# Altium PCB B45120517E(origin).PcbDoc (part 2 of 2)
Units mm, origin at the board's own origin, x right, y up, seen from the top; angles counter-clockwise.
Board outline 101.6 x 152.4 mm, 2 copper layers (Top Layer, Bottom Layer); 156 components, 88 nets, 425 pads, 670 vias.
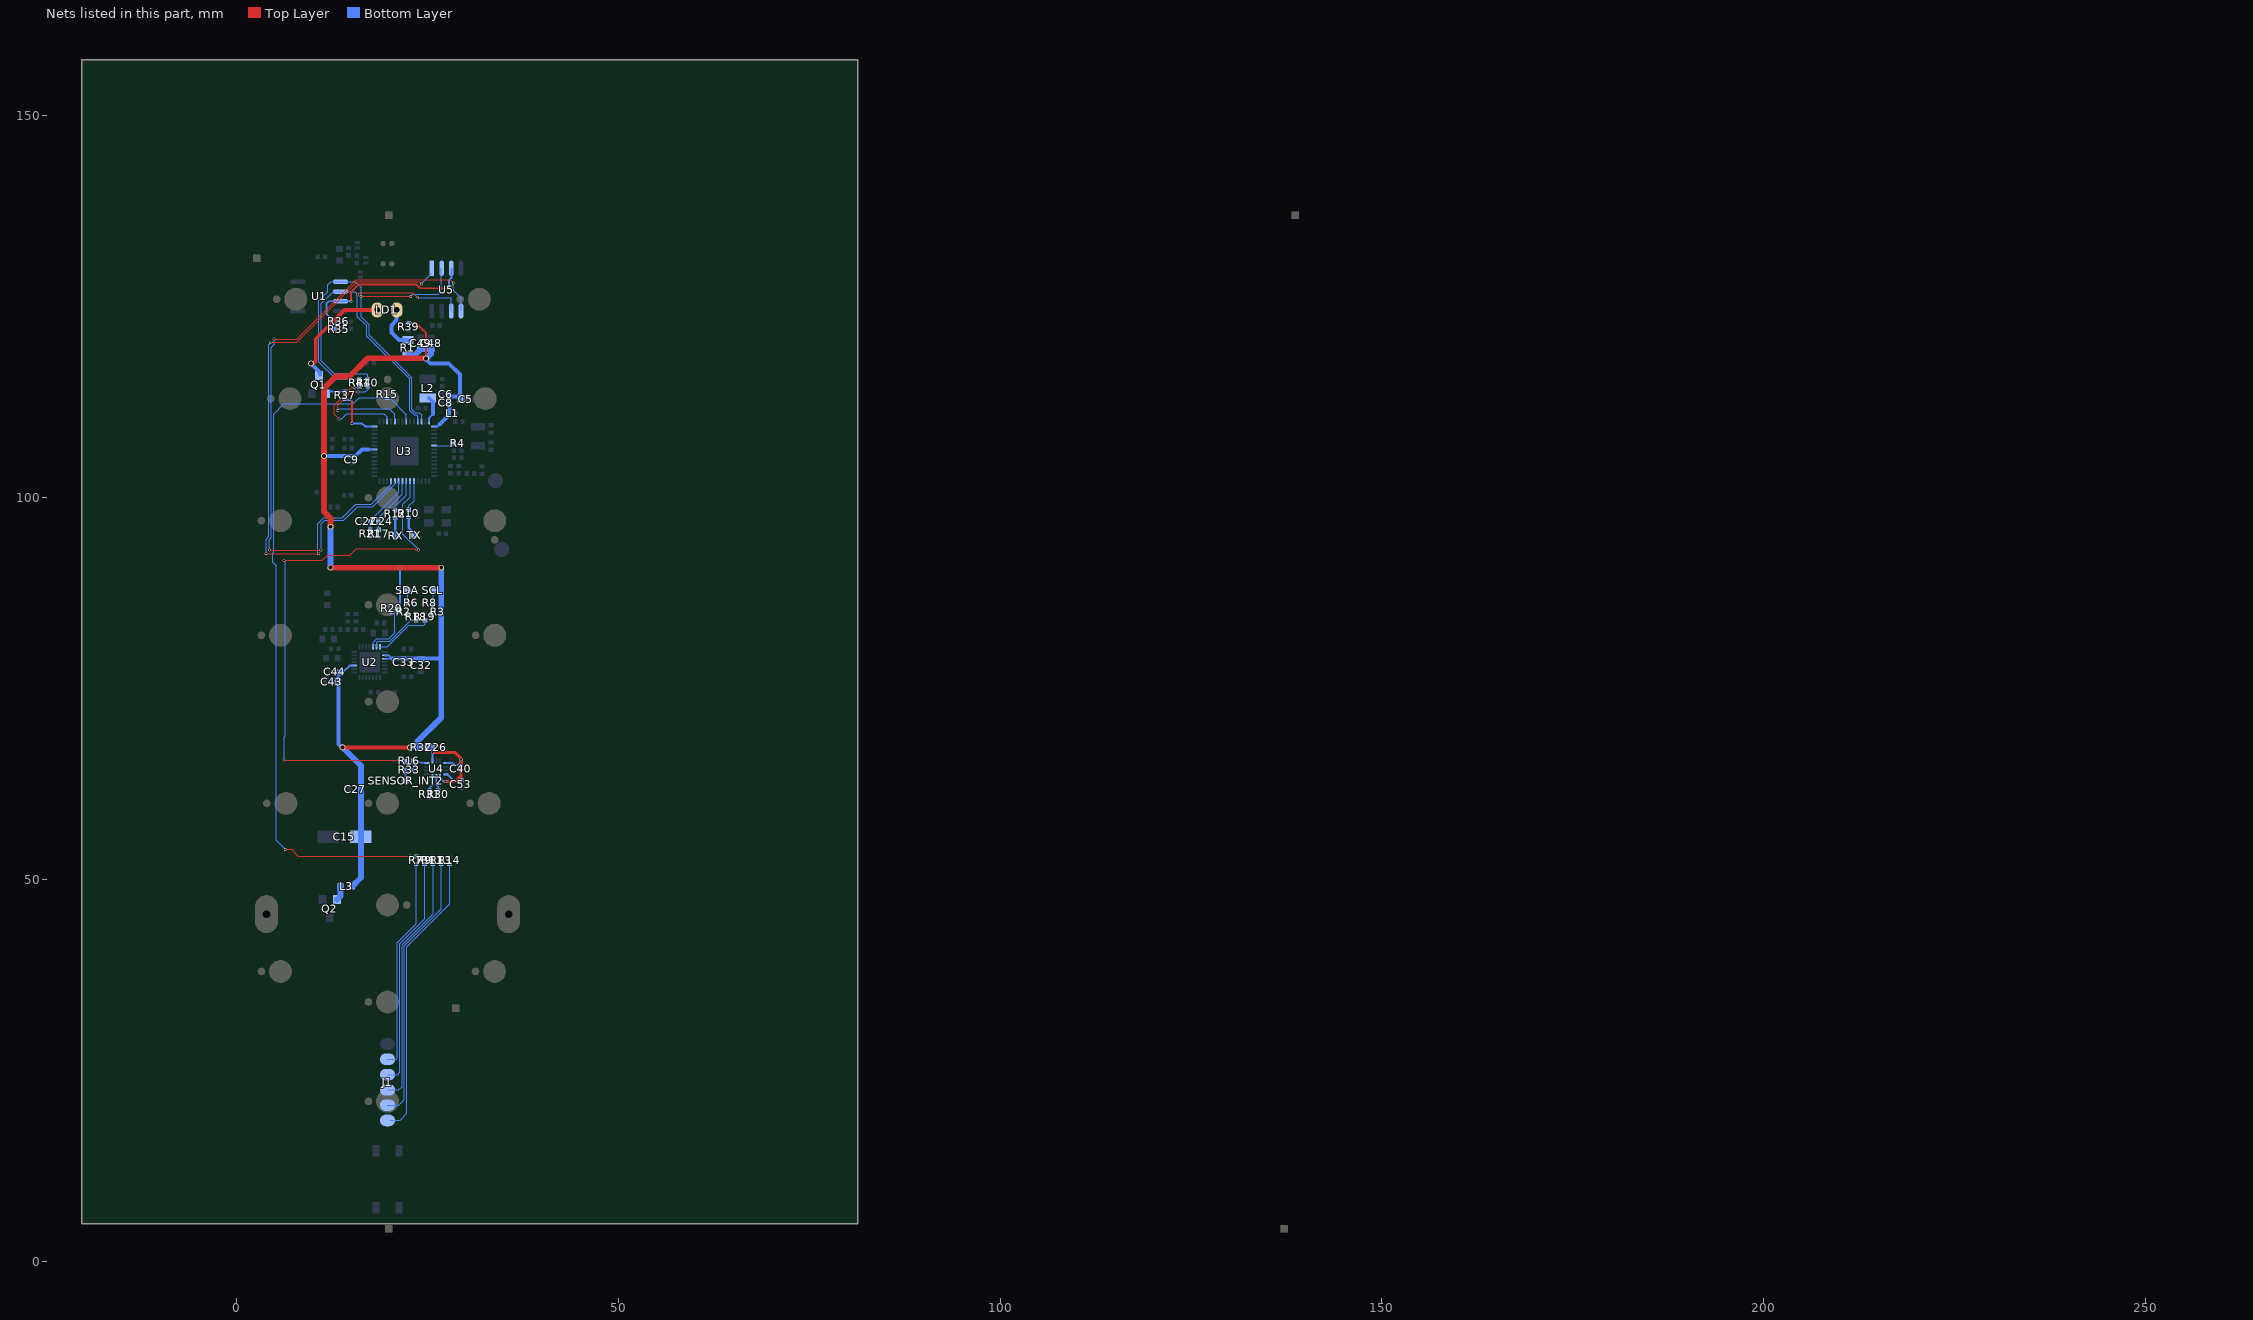
[diagram p2: the nets of this part, all layers, seen from the top]

## Via types
v1: diameter 0.381, hole 0.254, Top Layer to Bottom Layer, tented both sides, 661 vias
v2: diameter 0.762, hole 0.508, Top Layer to Bottom Layer, tented both sides, 9 vias

## Nets (pads, with @x,y where several pads share a name; then routed paths per layer and width w, separated by ;. In a path a pad name is that pad's centre, name@x,y a point inside that pad or via, vN(x,y) a via of type N, cw(c..) or ccw(c..) an arc to the next point about the centre after c; other vN are vias at no path point) (continued)
NetC53_1: C53.1 U4.11 | length 2.3
  Bottom Layer w0.254: U4.11@27.481,63.791 27.623,63.791 28.397,63.017 C53.1@29.439,63.017
NetJ1_2: J1.2 R7.1 | length 27.8
  Bottom Layer w0.152: J1.2@19.817,26.495 20.963,26.495 21.112,26.645 21.112,41.783 23.551,44.221 R7.1@23.551,52.07
NetJ1_3: J1.3 R9.1 | length 30.4
  Bottom Layer w0.152: J1.3@19.817,24.495 21.147,24.495 21.43,24.778 21.43,41.643 24.694,44.907 R9.1@24.694,52.07
NetJ1_4: J1.4 R11.1 | length 32.9
  Bottom Layer w0.152: J1.4@19.817,22.495 21.306,22.495 21.735,22.924 21.735,41.515 25.786,45.566 R11.1@25.786,52.07
NetJ1_5: J1.5 R13.1 | length 35.4
  Bottom Layer w0.152: J1.5@19.817,20.495 21.313,20.495 22.039,21.222 22.039,41.388 26.827,46.176 R13.1@26.827,52.07
NetJ1_6: J1.6 R14.1 | length 37.5
  Bottom Layer w0.152: J1.6@20.147,18.542 21.493,18.542 22.357,19.406 22.357,41.25 27.945,46.838 R14.1@27.945,52.07
NetL2_1: L2.1 U3.56 | length 3.5
  Bottom Layer w0.254: U3.56@25.277,109.996 25.277,110.463 25.76,110.947
  Bottom Layer w0.508: L2.1@25.252,113.081 25.76,112.573 25.76,110.947
NetL3_2: L3.2 Q2.1 | length 1.9
  Bottom Layer w0.762: Q2.1@13.223,47.428 13.651,47.856 L3.2@13.651,49.181
NetLD1_1: LD1.1 R1.1 | length 5.8
  Bottom Layer w0.508: LD1.1@21.02,124.601 21.02,123.255 20.32,122.555 20.32,121.641 21.311,120.65 R1.1@22.479,120.65
NetLD1_2: LD1.2 Q1.3 | length 15.3
  Top Layer w0.508: v2(9.784,117.602) 10.109,117.602 10.419,117.912 10.419,120.828 14.192,124.601 LD1.2@18.48,124.601
  Bottom Layer w0.508: v2(9.784,117.602) 11.003,116.383 Q1.3@11.003,116.129
NetQ1_1: Q1.1 R37.1 | length 2
  Bottom Layer w0.254: Q1.1@12.273,113.894 R37.1@14.305,113.894
NetR4_2: R4.2 U3.6 | length 2.9
  Bottom Layer w0.152: U3.6@25.927,106.846 28.238,106.846 R4.2@28.656,107.264
NetR6_1: R6.1 SDA.1 | length 1.6
  Bottom Layer w0.152: R6.1@22.458,86.233 SDA.1@22.458,87.859
NetR8_1: R8.1 SCL.1 | length 1.5
  Bottom Layer w0.152: R8.1@25.837,86.233 SCL.1@25.837,87.782
NetR10_2: R10.2 TX.1 | length 2.7
  Bottom Layer w0.305: R10.2@22.611,97.485 22.611,96.063 TX.1@23.525,95.148
NetR12_2: R12.2 RX.1 | length 2.3
  Bottom Layer w0.305: RX.1@20.833,95.123 R12.2@20.833,97.409
NetR16_2: R16.2 R33.2 U4.4 | length 3.1
  Bottom Layer w0.203: R33.2@23.144,64.414 R16.2@23.144,65.557 23.881,65.557 24.147,65.291 U4.4@24.955,65.291
NetR18_1: R18.1 U2.27 | length 7
  Bottom Layer w0.152: U2.27@18.38,80.486 18.38,81.042 18.567,81.229 20.102,81.229 22.845,83.972 R18.1@23.576,83.972
NetR19_1: R19.1 U2.28 | length 7.6
  Bottom Layer w0.152: U2.28@18.83,80.486 19.805,80.486 22.606,83.287 24.536,83.287 24.77,83.52 R19.1@24.77,83.922
NetR20_1: R20.1 U2.26 | length 6.9
  Bottom Layer w0.152: U2.26@17.93,80.486 17.93,81.1 18.39,81.559 19.996,81.559 20.752,82.315 20.752,84.709 R20.1@20.371,85.09
NetR30_1: R30.1 U4.13 | length 1.9
  Bottom Layer w0.203: U4.13@26.218,63.528 26.218,62.408 26.446,62.179 R30.1@26.446,61.697
NetR31_1: R31.1 U4.14 | length 2
  Bottom Layer w0.203: R31.1@25.354,61.697 25.354,62.078 25.718,62.441 U4.14@25.718,63.528
NetR33_1: R33.1 SENSOR_INT2.1 | length 1.4
  Bottom Layer w0.305: SENSOR_INT2.1@22.179,62.992 R33.1@22.179,64.414
NetR37_2: R37.2 U3.42 | length 7.1
  Top Layer w0.254: v1(15.143,109.728) v1(15.143,112.827)
  Bottom Layer w0.254: R37.2@14.305,112.928 14.407,112.827 v1(15.143,112.827) ; v1(15.143,109.728) 16.515,109.728 16.897,109.346 U3.42@18.127,109.346
P2_1: R7.2 R15.1 U3.50 | length 95.2
  Top Layer w0.152: v1(6.431,53.975) 7.269,53.975 8.158,53.086 v1(22.763,53.086)
  Bottom Layer w0.152: v1(6.431,53.975) 5.25,55.156 5.25,91.097 4.805,91.542 4.805,92.786 4.907,92.888 4.907,110.947 6.253,112.293 15.316,112.293 16.104,113.081 20.095,113.081 22.277,110.899 U3.50@22.277,109.996 ; v1(22.763,53.086) R7.2@23.525,53.086
PIO3: U3.24 U5.5 | length 81.3
  Top Layer w0.152: v1@4.348,93.142 v1(11.13,93.142) ; v1(4.971,120.777) 7.931,120.777 15.715,128.561 28.005,128.561 v1(28.423,128.143)
  Bottom Layer w0.152: v1(4.348,93.167) 4.348,94.564 4.589,94.805 4.589,119.697 4.971,120.078 v1(4.971,120.777) ; v1(11.13,93.142) 11.13,96.576 11.594,97.039 14.089,97.039 15.907,98.857 17.861,98.857 20.777,101.772 U3.24@20.777,102.196 ; v1(28.423,128.143) 28.423,127.178 29.464,126.136 U5.5@29.464,124.454
PIO4: U3.25 U5.1 | length 75.9
  Top Layer w0.152: v1(3.929,92.685) v1(10.774,92.685) ; v1@4.551,120.345 7.931,120.345 15.842,128.256 23.996,128.256 v1(24.236,128.016)
  Bottom Layer w0.152: v1(3.929,92.685) 3.929,94.601 4.272,94.944 4.272,120.066 v1@4.551,120.345 ; v1(10.774,92.685) 10.711,92.748 10.711,96.608 11.473,97.37 13.886,97.37 15.678,99.162 17.683,99.162 20.277,101.755 U3.25@20.277,102.196 ; v1(24.236,128.016) U5.1@25.644,129.423
  other v1: 4.551,120.371
RX: R12.1 U3.21 | length 4.4
  Bottom Layer w0.152: R12.1@20.833,98.374 20.833,98.887 22.277,100.331 U3.21@22.277,102.196
SCL: R40.2 U1.6 U3.53 U5.6 | length 54.8
  Top Layer w0.152: v1(15.88,126.619) 15.905,126.619 16.108,126.822 23.144,126.822 v1(23.779,126.187)
  Bottom Layer w0.152: R40.2@17.247,115.57 17.247,116.103 17.094,116.256 12.878,116.256 11.176,117.958 11.176,125.476 12.7,127 15.499,127 v1(15.88,126.619) 15.88,123.722 17.089,122.513 17.089,121.172 22.7,115.561 22.7,111.492 23.335,110.857 23.613,110.857 23.777,110.693 U3.53@23.777,109.996 ; v1(23.779,126.187) 28.07,126.187 28.194,126.064 U5.6@28.194,124.454
SCL1: C24.2 R17.2 U3.22 | length 7.6
  Bottom Layer w0.152: R17.2@18.694,95.86 18.694,97.384 21.777,100.466 U3.22@21.777,102.196
SCL-1: R40.1 U3.47 | length 14.7
  Top Layer w0.152: v1(13.31,111.43) 13.31,112.141 15.037,113.868 v1(15.977,113.868)
  Bottom Layer w0.152: v1(13.31,111.43) 13.524,111.644 20.055,111.644 20.777,110.922 U3.47@20.777,109.996 ; v1(15.977,113.868) 16.916,113.868 17.272,114.224 R40.1@17.272,114.63
SDA: R41.2 U1.5 U3.54 U5.2 | length 56.6
  Top Layer w0.152: v1(16.362,126.39) v1@22.86,126.39
  Bottom Layer w0.152: R41.2@16.154,115.57 13.03,115.57 10.846,117.754 10.846,125.832 12.014,127 12.014,127.889 12.395,128.27 15.626,128.27 16.362,127.533 16.362,123.673 17.406,122.629 17.406,121.303 23.005,115.705 23.005,111.619 23.454,111.169 23.963,111.169 24.277,110.856 U3.54@24.277,109.996 ; v1(22.86,126.34) 23.139,126.619 26.467,126.619 26.873,127.025 U5.2@26.873,130.054
SDA1: C22.2 R21.2 U3.23 | length 7.9
  Bottom Layer w0.152: R21.2@17.551,95.86 17.551,97.003 21.277,100.728 U3.23@21.277,102.196
SDA-1: R41.1 U3.45 | length 13.5
  Top Layer w0.152: v1(13.462,110.338) 12.852,110.947 12.852,112.135 15.17,114.452 v1(15.469,114.452)
  Bottom Layer w0.152: v1@13.513,110.363 13.818,110.363 14.489,111.035 19.318,111.035 19.777,110.576 U3.45@19.777,109.996 ; v1(15.469,114.452) R41.1@16.078,114.452
SENSOR_INT: R16.1 U3.20 | length 70.7
  Top Layer w0.152: v1(6.248,91.821) 11.307,91.821 11.993,92.507 14.884,92.507 15.697,93.32 23.393,93.32 23.546,93.167 v1(23.876,93.167) ; v1(6.279,65.659) v1(21.265,65.659)
  Bottom Layer w0.152: v1(6.248,91.821) 6.444,91.626 6.444,68.821 6.279,68.656 v1(6.279,65.659) ; v1(21.265,65.659) R16.1@22.077,65.659 ; U3.20@22.777,102.196 22.777,100.094 21.844,99.162 21.844,95.225 v1@23.889,93.18
TX: R10.1 U3.19 | length 4.1
  Bottom Layer w0.152: R10.1@22.611,98.45 22.611,98.958 23.292,99.639 U3.19@23.292,102.26
VBAT: C5.1 C6.1 C8.1 C9.1 C15.1 C27.1 C32.1 C33.1 C43.1 C44.1 C48.1 C49.1 L1.1 L3.1 R1.2 R2.1 R3.1 R32.2 R39.2 U2.2 U2.3 U2.17 U3.1 U3.36 | length 167
  Top Layer w0.254: v1(23.552,122.885) 24.846,121.591 v2(24.846,118.262)
  Top Layer w0.508: v2(13.924,67.335) v2(22.738,67.335)
  Top Layer w0.762: v2(12.375,90.856) v2(26.853,90.856) ; v2(12.375,96.215) 12.375,97.307 11.498,98.184 11.498,114.338 13.035,115.875 14.838,115.875 17.226,118.262 v2(24.846,118.262)
  Bottom Layer w0.254: C44.1@13.391,77.216 14.026,77.216 14.846,78.036 U2.17@15.48,78.036 ; 17.327,106.346 U3.36@18.127,106.346 ; U2.3@19.48,78.936 20.368,78.936 ; U2.2@19.48,79.386 19.984,79.386 20.401,78.969 ; R2.1@21.442,85.09 v1(21.442,90.83) ; R39.2@22.581,122.885 v1(23.552,122.885) ; U3.1@25.927,109.346 26.369,109.346 26.611,109.588
  Bottom Layer w0.508: v2(11.498,105.461) 15.6,105.461 16.485,106.346 17.327,106.346 ; C44.1@13.391,77.216 13.391,67.767 v2@13.822,67.335 ; 20.401,78.969 26.853,78.969 ; v2(22.738,67.335) R32.2@23.728,67.335 ; v2@24.846,118.166 25.41,117.602 27.842,117.602 29.291,116.153 C5.1@29.291,112.903 28.935,113.259 27.945,113.259 27.945,111.608 27.818,111.481 27.818,110.795 26.611,109.588
  Bottom Layer w0.762: v2(12.375,90.856) v2(12.375,96.215) ; v2(13.924,67.335) 16.337,64.922 16.337,50.292 L3.1@15.194,49.149 ; R1.2@22.479,118.618 23.317,118.618 C49.1@24.155,119.456 C48.1@25.552,119.456 ; R32.2@23.728,67.335 23.728,68.097 26.853,71.222 v2(26.853,90.856) ; v2@24.846,118.166 25.527,118.847 C48.1@25.527,119.075
VDD_SENSOR: C26.1 C40.1 R32.1 U4.5 U4.8 U4.12 | length 15.3
  Top Layer w0.406: v1(25.718,66.675) 28.631,66.675 29.418,65.888 29.418,63.551 28.707,62.84 v1(27.386,62.84)
  Bottom Layer w0.25: U4.5@25.718,65.554 C26.1@25.718,67.318 ; U4.12@26.718,63.528 26.718,63.279 27.157,62.84 v1(27.386,62.84) ; U4.8@27.481,65.291 28.389,65.291 28.656,65.024 C40.1@29.393,65.024
  Bottom Layer w0.406: R32.1@24.694,67.335 C26.1@25.735,67.335 ; C40.1@29.393,65.024 29.418,65.049 v1(29.418,65.735)
WP: R35.2 R36.2 U1.7 U5.3 | length 25
  Top Layer w0.254: v1(15.016,125.73) 15.016,126.928 15.989,127.9 23.665,127.9 24.133,127.432 v1(27.864,127.432)
  Bottom Layer w0.254: R35.2@12.984,121.869 R36.2@12.984,123.139 ; R36.2@13.086,123.088 12.802,123.088 11.816,124.074 11.816,125.4 12.146,125.73 v1(15.016,125.73) ; v1(27.864,127.432) 27.864,128.499 28.169,128.804 U5.3@28.169,130.054
pads on no net: MARK1.1 MARK1.4 MARK2.1 MARK2.4 MARK3.1 MARK3.4 MARK4.1 MARK4.4 MARK5.1 MARK5.4 MARK6.1 MARK6.4 MARK7.1 MARK7.4 MARK8.1 MARK8.4 MARK9.1 MARK10.1 MARK10.4 MARK11.1 MARK12.1 MARK12.4 U2.9 U2.10 U2.11 U2.12 U2.14 U2.15 U2.16 U2.23 U2.24 U3.0@17.403,103.352 U3.0@17.403,105.842 U3.0@17.403,108.356 U3.0@19.766,110.668 U3.0@20.274,101.473 U3.0@22.28,110.668 U3.0@22.763,101.473 U3.0@24.769,110.668 U3.0@25.277,101.473 U3.0@26.649,104.851 U3.0@26.649,107.34 U3.2 U3.16 U3.17 U3.18 U3.32 U3.33 U3.51 U4.2 U4.3 U4.9 U4.10

## Polygon pours and split planes (outlines as drawn)
AGND on Top Layer "Top Layer-AGND" (solid, remove dead copper, pour order 1000): 10.698,86.538 10.698,72.898 26.167,72.898 26.167,86.538
GND on Top Layer "Top Layer-GND" (solid, remove dead copper, pour order 1001): -0.786,137.173 40.616,137.173 40.616,86.525 10.669,86.525 10.669,72.885 26.138,72.885 26.138,86.525 40.616,86.525 40.616,31.077 24.385,31.077 24.385,5.143 14.784,5.143 14.784,30.772 -0.786,30.772
GND on Bottom Layer "Bottom Layer-GND" (solid, remove dead copper, pour order 1003): -0.785,137.154 40.617,137.154 40.617,86.506 10.67,86.506 10.67,72.866 26.139,72.866 26.139,86.506 40.617,86.506 40.617,31.058 24.386,31.058 24.386,5.124 14.785,5.124 14.785,30.753 -0.785,30.753
AGND on Bottom Layer "Bottom Layer-AGND" (solid, remove dead copper, pour order 1002): 10.693,86.538 10.693,72.898 26.162,72.898 26.162,86.538

## Keep-outs
Top Overlay:
  circle w0.127: c34.767,93.251 r0.8
  circle w0.127: c34.159,97.32 r0.5
  circle w0.127: c33.969,102.25 r0.8
  circle w0.127: c34.159,107.12 r0.5
Keep-Out Layer:
  circle w0.127: c13.679,118.909 r1.6
  circle w0.127: c26.659,40.76 r1.6
  circle w0.127: c5,3 r1.5
  circle w0.127: c153.632,2.995 r1.5
  circle w0.127: c153.632,138.3 r1.5
  circle w0.127: c5,138.3 r1.5
  circle w0.127: c26.659,40.76 r1.6
  circle w0.127: c13.679,118.909 r1.6
  circle w0.127: c53.337,118.909 r1.6
  circle w0.127: c66.317,40.76 r1.6
  circle w0.127: c66.317,40.761 r1.6
  circle w0.127: c53.337,118.909 r1.6
  circle w0.127: c92.995,118.909 r1.6
  circle w0.127: c105.975,40.76 r1.6
  circle w0.127: c105.975,40.76 r1.6
  circle w0.127: c92.995,118.909 r1.6
  circle w0.127: c132.653,118.909 r1.6
  circle w0.127: c145.633,40.76 r1.6
  circle w0.127: c145.633,40.761 r1.6
  circle w0.127: c132.653,118.909 r1.6
  lines w0.127: 12.6,135.3 12.6,132.6 1.4,132.6 1.4,120.94 0,120.94 0,109.5 ; 15.8,6 23.7,6 ; 55.458,6 63.358,6 ; 79.316,120.94 77.916,120.94 77.916,132.6 66.715,132.6 66.715,135.3 52.258,135.3 52.258,132.6 41.058,132.6 41.058,120.94 39.658,120.94 ; 95.116,6 103.016,6 ; 95.145,31.5 95.145,6.01 103.145,6.01 103.145,31.5 118.974,31.5 ; 95.145,31.5 79.316,31.5 ; 117.573,43.5 118.974,43.5 ; 117.573,76 118.974,76 ; 117.573,101.5 118.974,101.5 ; 117.573,109.5 118.974,109.5 ; 117.573,43.5 117.573,76 ; 117.573,101.5 117.573,109.5 ; 118.974,120.94 117.573,120.94 117.573,132.6 106.373,132.6 106.373,135.3 91.916,135.3 91.916,132.6 80.716,132.6 80.716,120.94 79.316,120.94 79.316,109.5 ; 134.774,6 142.674,6 ; 142.803,31.5 142.803,6.01 134.803,6.01 134.803,31.5 118.974,31.5 ; 142.803,31.5 158.632,31.5 158.632,43.5 157.231,43.5 ; 157.231,76 158.632,76 158.632,101.5 157.231,101.5 ; 157.231,109.5 158.632,109.5 158.632,120.94 157.232,120.94 157.232,132.6 146.031,132.6 146.031,135.3 131.574,135.3 131.574,132.6 120.374,132.6 120.374,120.94 118.974,120.94 118.974,109.5 ; 157.231,43.5 157.231,76 ; 157.231,101.5 157.231,109.5 ; 157.632,-0.006 ccw(c157.632,0.994) 158.632,0.994 158.632,5.995 ; 157.632,0 22.986,0 1,0 cw(c1,1) 0,1 0,6 158.632,6 ; 0,31.5 15.829,31.5 ; 0,31.5 0,43.5 ; 0,31.5 0,43.5 ; 0,31.5 15.829,31.5 ; 0,31.5 0,43.5 ; 0,31.5 15.829,31.5 ; 0,43.5 1.4,43.5 ; 0,43.5 1.4,43.5 ; 0,43.5 1.4,43.5 ; 0,76 1.4,76 ; 0,76 0,101.5 ; 0,76 1.4,76 ; 0,76 0,101.5 ; 0,76 1.4,76 ; 0,76 0,101.5 ; 0,101.5 1.4,101.5 ; 0,101.5 1.4,101.5 ; 0,101.5 1.4,101.5 ; 0,109.5 1.4,109.5 ; 0,109.5 1.4,109.5 ; 0,109.5 1.4,109.5 ; 1.4,43.5 1.4,76 ; 1.4,43.5 1.4,76 ; 1.4,43.5 1.4,76 ; 1.4,101.5 1.4,109.5 ; 1.4,101.5 1.4,109.5 ; 1.4,101.5 1.4,109.5 ; 15.829,6.01 15.829,31.5 ; 15.829,6.01 23.82,6.01 23.82,31.5 39.658,31.5 ; 15.829,6.01 15.829,31.5 ; 15.829,6.01 23.829,6.01 ; 15.829,6.01 15.829,31.5 ; 15.829,6.01 23.829,6.01 ; 23.829,6.01 23.829,31.5 39.658,31.5 ; 23.829,6.01 23.811,31.5 39.658,31.5 ; 27.057,135.3 0,135.3 0,140.3 cw(c1,140.3) 1,141.3 25.577,141.3 157.632,141.3 cw(c157.632,140.3) 158.632,140.3 158.632,135.3 27.057,135.3 ; 27.057,135.3 27.057,132.6 38.257,132.6 38.257,120.94 39.658,120.94 ; 38.257,43.5 38.257,76 ; 38.257,43.5 39.658,43.5 ; 38.257,43.5 38.257,76 ; 38.257,43.5 39.658,43.5 ; 38.257,43.5 38.257,76 ; 38.257,43.5 39.658,43.5 ; 38.257,76 39.658,76 ; 38.257,76 39.658,76 ; 38.257,76 39.658,76 ; 38.257,101.5 39.658,101.5 ; 38.257,101.5 38.257,109.5 ; 38.257,101.5 39.658,101.5 ; 38.257,101.5 38.257,109.5 ; 38.257,101.5 38.257,109.5 ; 38.257,101.5 39.658,101.5 ; 38.257,109.5 39.658,109.5 ; 38.257,109.5 39.658,109.5 ; 38.257,109.5 39.658,109.5 ; 39.658,31.5 39.658,43.5 ; 39.658,31.5 39.658,43.5 ; 39.658,31.5 55.487,31.5 55.487,6.01 63.487,6.01 63.487,31.5 79.316,31.5 ; 39.658,31.5 39.658,43.5 ; 39.658,31.5 39.658,43.5 ; 39.658,43.5 41.058,43.5 41.058,76 39.658,76 ; 39.658,76 39.658,101.5 ; 39.658,76 39.658,101.5 ; 39.658,76 39.658,101.5 ; 39.658,76 39.658,101.5 ; 39.658,101.5 41.058,101.5 41.058,109.5 39.658,109.5 ; 39.658,109.5 39.658,120.94 ; 79.316,31.5 79.316,43.5 ; 79.316,31.5 79.316,43.5 ; 79.316,43.5 77.915,43.5 77.915,76 79.316,76 ; 79.316,43.5 80.716,43.5 80.716,76 79.316,76 ; 79.316,76 79.316,101.5 ; 79.316,76 79.316,101.5 ; 79.316,101.5 77.915,101.5 77.915,109.5 79.316,109.5 ; 79.316,101.5 80.716,101.5 80.716,109.5 79.316,109.5 ; 118.974,31.5 118.974,43.5 ; 118.974,31.5 118.974,43.5 ; 118.974,43.5 120.374,43.5 120.374,76 118.974,76 ; 118.974,76 118.974,101.5 ; 118.974,76 118.974,101.5 ; 118.974,101.5 120.374,101.5 120.374,109.5 118.974,109.5

## Other copper
Top Layer:
  pour cut-out: 17.551,125.755 17.551,123.469 17.78,123.368 21.92,123.368 22.123,123.368 22.149,125.755
  pour cut-out: 27.997,127.111 28.47,126.982 28.829,127.356 28.29,127.822
  pour cut-out: 31.047,137.262 31.047,109.836 35.001,110.465 35.01,98.959 33.104,98.959 33.104,93.579 34.002,93.511 34.036,84.988 39.268,84.989 39.878,84.988 39.649,137.262
  pour cut-out: 19.826,24.522 20.131,24.522 20.639,24.42 21.121,24.268 21.629,24.014 22.061,23.709 22.391,23.404 22.671,23.074 22.95,22.642 23.153,22.185 23.17,21.666 23.17,21.387 23.17,20.98 23.17,20.726 23.17,20.472 23.17,20.091 23.153,19.772 22.95,19.34 22.747,18.985 22.468,18.654 22.137,18.324 21.883,18.121 21.629,17.943 21.375,17.842 20.944,17.689 20.563,17.562 19.978,17.511 19.293,17.537 18.785,17.638 18.277,17.842 17.845,18.121 17.413,18.451 17.007,18.908 16.702,19.391 16.54,19.914 16.54,20.396 16.54,20.93 16.54,21.59 16.54,21.895 16.549,22.287 16.905,22.947 17.388,23.557 17.972,23.988 18.454,24.242 19.064,24.446
  pour cut-out: 33.835,41.522 34.14,41.522 34.648,41.42 35.13,41.268 35.638,41.014 36.07,40.709 36.4,40.404 36.68,40.074 36.959,39.642 37.162,39.185 37.264,38.753 37.34,38.271 37.341,38 37.34,37.585 37.264,37.102 37.162,36.772 36.959,36.34 36.756,35.985 36.477,35.654 36.146,35.324 35.892,35.121 35.638,34.943 35.384,34.842 34.953,34.689 34.572,34.562 33.987,34.511 33.302,34.537 32.794,34.638 32.286,34.842 31.854,35.121 31.422,35.451 31.016,35.908 30.711,36.391 30.482,36.924 30.355,37.483 30.304,38.017 30.381,38.677 30.558,39.287 30.914,39.947 31.397,40.557 31.981,40.988 32.463,41.242 33.073,41.446
  pour cut-out: 19.823,37.522 20.128,37.522 20.636,37.42 21.118,37.268 21.626,37.014 22.058,36.709 22.388,36.404 22.668,36.074 22.947,35.642 23.15,35.185 23.252,34.753 23.328,34.271 23.329,34 23.328,33.585 23.252,33.102 23.15,32.772 22.947,32.34 22.744,31.985 22.465,31.654 22.134,31.324 21.88,31.121 21.626,30.943 21.372,30.842 20.941,30.689 20.56,30.562 19.975,30.511 19.29,30.537 18.782,30.638 18.274,30.842 17.842,31.121 17.41,31.451 17.004,31.908 16.699,32.391 16.47,32.924 16.343,33.483 16.292,34.017 16.369,34.677 16.546,35.287 16.902,35.947 17.385,36.557 17.969,36.988 18.451,37.242 19.061,37.446
  pour cut-out: 5.811,41.522 6.116,41.522 6.624,41.42 7.106,41.268 7.614,41.014 8.046,40.709 8.376,40.404 8.656,40.074 8.935,39.642 9.138,39.185 9.24,38.753 9.316,38.271 9.317,38 9.316,37.585 9.24,37.102 9.138,36.772 8.935,36.34 8.732,35.985 8.453,35.654 8.122,35.324 7.868,35.121 7.614,34.943 7.36,34.842 6.929,34.689 6.548,34.562 5.963,34.511 5.278,34.537 4.77,34.638 4.262,34.842 3.83,35.121 3.398,35.451 2.992,35.908 2.687,36.391 2.458,36.924 2.331,37.483 2.28,38.017 2.357,38.677 2.534,39.287 2.89,39.947 3.373,40.557 3.957,40.988 4.439,41.242 5.049,41.446
  pour cut-out: 19.823,50.222 20.128,50.222 20.636,50.12 21.118,49.968 21.626,49.714 22.058,49.409 22.388,49.104 22.668,48.774 22.947,48.342 23.15,47.885 23.252,47.453 23.328,46.971 23.329,46.7 23.328,46.285 23.252,45.802 23.15,45.472 22.947,45.04 22.744,44.685 22.465,44.354 22.134,44.024 21.88,43.821 21.626,43.643 21.372,43.542 20.941,43.389 20.56,43.262 19.975,43.211 19.29,43.237 18.782,43.338 18.274,43.542 17.842,43.821 17.41,44.151 17.004,44.608 16.699,45.091 16.47,45.624 16.343,46.183 16.292,46.717 16.369,47.377 16.546,47.987 16.902,48.647 17.385,49.257 17.969,49.688 18.451,49.942 19.061,50.146
  pour cut-out: 33.123,63.522 33.428,63.522 33.936,63.42 34.418,63.268 34.926,63.014 35.358,62.709 35.688,62.404 35.968,62.074 36.247,61.642 36.45,61.185 36.552,60.753 36.628,60.271 36.629,60 36.628,59.585 36.552,59.102 36.45,58.772 36.247,58.34 36.044,57.985 35.765,57.654 35.434,57.324 35.18,57.121 34.926,56.943 34.672,56.842 34.241,56.689 33.86,56.562 33.275,56.511 32.59,56.537 32.082,56.638 31.574,56.842 31.142,57.121 30.71,57.451 30.304,57.908 29.999,58.391 29.77,58.924 29.643,59.483 29.592,60.017 29.669,60.677 29.846,61.287 30.202,61.947 30.685,62.557 31.269,62.988 31.751,63.242 32.361,63.446
  pour cut-out: 19.823,63.522 20.128,63.522 20.636,63.42 21.118,63.268 21.626,63.014 22.058,62.709 22.388,62.404 22.668,62.074 22.947,61.642 23.15,61.185 23.252,60.753 23.328,60.271 23.329,60 23.328,59.585 23.252,59.102 23.15,58.772 22.947,58.34 22.744,57.985 22.465,57.654 22.134,57.324 21.88,57.121 21.626,56.943 21.372,56.842 20.941,56.689 20.56,56.562 19.975,56.511 19.29,56.537 18.782,56.638 18.274,56.842 17.842,57.121 17.41,57.451 17.004,57.908 16.699,58.391 16.47,58.924 16.343,59.483 16.292,60.017 16.369,60.677 16.546,61.287 16.902,61.947 17.385,62.557 17.969,62.988 18.451,63.242 19.061,63.446
  pour cut-out: 6.523,63.522 6.828,63.522 7.336,63.42 7.818,63.268 8.326,63.014 8.758,62.709 9.088,62.404 9.368,62.074 9.647,61.642 9.85,61.185 9.952,60.753 10.028,60.271 10.029,60 10.028,59.585 9.952,59.102 9.85,58.772 9.647,58.34 9.444,57.985 9.165,57.654 8.834,57.324 8.58,57.121 8.326,56.943 8.072,56.842 7.641,56.689 7.26,56.562 6.675,56.511 5.99,56.537 5.482,56.638 4.974,56.842 4.542,57.121 4.11,57.451 3.704,57.908 3.399,58.391 3.17,58.924 3.043,59.483 2.992,60.017 3.069,60.677 3.246,61.287 3.602,61.947 4.085,62.557 4.669,62.988 5.151,63.242 5.761,63.446
  pour cut-out: 19.823,76.822 20.128,76.822 20.636,76.72 21.118,76.568 21.626,76.314 22.058,76.009 22.388,75.704 22.668,75.374 22.947,74.942 23.15,74.485 23.252,74.053 23.328,73.571 23.329,73.3 23.328,72.885 23.252,72.402 23.15,72.072 22.947,71.64 22.744,71.285 22.465,70.954 22.134,70.624 21.88,70.421 21.626,70.243 21.372,70.142 20.941,69.989 20.56,69.862 19.975,69.811 19.29,69.837 18.782,69.938 18.274,70.142 17.842,70.421 17.41,70.751 17.004,71.208 16.699,71.691 16.47,72.224 16.343,72.783 16.292,73.317 16.369,73.977 16.546,74.587 16.902,75.247 17.385,75.857 17.969,76.288 18.451,76.542 19.061,76.746
  pour cut-out: 33.85,85.522 34.155,85.522 34.663,85.42 35.145,85.268 35.653,85.014 36.085,84.709 36.415,84.404 36.695,84.074 36.974,83.642 37.177,83.185 37.279,82.753 37.355,82.271 37.356,82 37.355,81.585 37.279,81.102 37.177,80.772 36.974,80.34 36.771,79.985 36.492,79.654 36.161,79.324 35.907,79.121 35.653,78.943 35.399,78.842 34.968,78.689 34.587,78.562 34.002,78.511 33.317,78.537 32.809,78.638 32.301,78.842 31.869,79.121 31.437,79.451 31.031,79.908 30.726,80.391 30.497,80.924 30.37,81.483 30.319,82.017 30.396,82.677 30.573,83.287 30.929,83.947 31.412,84.557 31.996,84.988 32.478,85.242 33.088,85.446
  pour cut-out: 18.153,88.737 18.509,88.915 18.89,89.067 19.22,89.143 19.55,89.194 19.956,89.194 20.363,89.169 20.795,89.042 21.125,88.94 21.557,88.711 21.861,88.508 22.141,88.254 22.395,87.975 22.598,87.67 22.725,87.416 22.852,87.111 22.954,86.781 23.004,86.476 23.029,86 23.03,85.613 22.954,85.206 22.801,84.749 22.623,84.393 22.446,84.114 22.192,83.809 21.861,83.53 21.582,83.327 21.201,83.098 20.896,82.971 20.515,82.869 20.16,82.819 19.779,82.793 19.321,82.844 18.864,82.946 18.458,83.123 18.153,83.276 17.924,83.454 17.594,83.708 17.493,83.835 17.239,84.139 17.035,84.419 16.908,84.698 16.781,85.003 16.705,85.308 16.654,85.613 16.629,85.917 16.654,86.248 16.705,86.603 16.807,86.959 16.934,87.314 17.086,87.645 17.239,87.899 17.467,88.178 17.747,88.457
  pour cut-out: 33.85,100.522 34.155,100.522 34.663,100.42 35.145,100.268 35.653,100.014 36.085,99.709 36.415,99.404 36.695,99.074 36.974,98.642 37.177,98.185 37.279,97.753 37.355,97.271 37.356,97 37.355,96.585 37.279,96.102 37.177,95.772 36.974,95.34 36.771,94.985 36.492,94.654 36.161,94.324 35.907,94.121 35.653,93.943 35.399,93.842 34.968,93.689 34.587,93.562 34.002,93.511 33.317,93.537 32.809,93.638 32.301,93.842 31.869,94.121 31.437,94.451 31.031,94.908 30.726,95.391 30.497,95.924 30.37,96.483 30.319,97.017 30.396,97.677 30.573,98.287 30.929,98.947 31.412,99.557 31.996,99.988 32.478,100.242 33.088,100.446
  pour cut-out: 5.796,100.522 6.101,100.522 6.609,100.42 7.091,100.268 7.599,100.014 8.031,99.709 8.361,99.404 8.641,99.074 8.92,98.642 9.123,98.185 9.225,97.753 9.301,97.271 9.302,97 9.301,96.585 9.225,96.102 9.123,95.772 8.92,95.34 8.717,94.985 8.438,94.654 8.107,94.324 7.853,94.121 7.599,93.943 7.345,93.842 6.914,93.689 6.533,93.562 5.948,93.511 5.263,93.537 4.755,93.638 4.247,93.842 3.815,94.121 3.383,94.451 2.977,94.908 2.672,95.391 2.443,95.924 2.316,96.483 2.265,97.017 2.342,97.677 2.519,98.287 2.875,98.947 3.358,99.557 3.942,99.988 4.424,100.242 5.034,100.446
  pour cut-out: 32.608,116.509 32.913,116.509 33.421,116.407 33.903,116.255 34.411,116.001 34.843,115.696 35.173,115.391 35.453,115.061 35.732,114.629 35.935,114.172 36.037,113.74 36.113,113.258 36.114,112.987 36.113,112.572 36.037,112.089 35.935,111.759 35.732,111.327 35.529,110.972 35.25,110.641 34.919,110.311 34.665,110.108 34.411,109.93 34.157,109.829 33.726,109.676 33.345,109.549 32.76,109.498 32.075,109.524 31.567,109.625 31.059,109.829 30.627,110.108 30.195,110.438 29.789,110.895 29.484,111.378 29.418,111.912 29.24,112.471 29.077,113.004 29.154,113.664 29.331,114.274 29.687,114.934 30.17,115.544 30.754,115.975 31.236,116.229 31.846,116.433
  pour cut-out: 7.037,116.509 7.342,116.509 7.85,116.407 8.332,116.255 8.84,116.001 9.272,115.696 9.602,115.391 9.882,115.061 10.161,114.629 10.364,114.172 10.466,113.74 10.542,113.258 10.543,112.987 10.542,112.572 10.466,112.089 10.364,111.759 10.161,111.327 9.958,110.972 9.679,110.641 9.348,110.311 9.094,110.108 8.84,109.93 8.586,109.829 8.155,109.676 7.774,109.549 7.189,109.498 6.504,109.524 5.996,109.625 5.488,109.829 5.056,110.108 4.624,110.438 4.218,110.895 3.913,111.378 3.684,111.911 3.557,112.47 3.506,113.004 3.583,113.664 3.76,114.274 4.116,114.934 4.599,115.544 5.183,115.975 5.665,116.229 6.275,116.433
  pour cut-out: 31.835,129.522 32.14,129.522 32.648,129.42 33.13,129.268 33.638,129.014 34.07,128.709 34.4,128.404 34.68,128.074 34.959,127.642 35.162,127.185 35.264,126.753 35.34,126.271 35.341,126 35.34,125.585 35.264,125.102 35.162,124.772 34.959,124.34 34.756,123.985 34.477,123.654 34.146,123.324 33.892,123.121 33.638,122.943 33.384,122.842 32.953,122.689 32.572,122.562 31.987,122.511 31.302,122.537 30.794,122.638 30.286,122.842 29.854,123.121 29.422,123.451 29.016,123.908 28.711,124.391 28.482,124.924 28.355,125.483 28.304,126.017 28.381,126.677 28.558,127.287 28.914,127.947 29.397,128.557 29.981,128.988 30.463,129.242 31.073,129.446
  pour cut-out: 7.811,129.522 8.116,129.522 8.624,129.42 9.106,129.268 9.614,129.014 10.046,128.709 10.376,128.404 10.656,128.074 10.935,127.642 11.138,127.185 11.24,126.753 11.316,126.271 11.317,126 11.316,125.585 11.24,125.102 11.138,124.772 10.935,124.34 10.732,123.985 10.453,123.654 10.122,123.324 9.868,123.121 9.614,122.943 9.36,122.842 8.929,122.689 8.548,122.562 7.963,122.511 7.278,122.537 6.77,122.638 6.262,122.842 5.83,123.121 5.398,123.451 4.992,123.908 4.687,124.391 4.458,124.924 4.331,125.483 4.28,126.017 4.357,126.677 4.534,127.287 4.89,127.947 5.373,128.557 5.957,128.988 6.439,129.242 7.049,129.446
  pour cut-out: 5.796,85.522 6.101,85.522 6.609,85.42 7.091,85.268 7.599,85.014 8.031,84.709 8.361,84.404 8.641,84.074 8.92,83.642 9.123,83.185 9.225,82.753 9.301,82.271 9.302,82 9.301,81.585 9.225,81.102 9.123,80.772 8.92,80.34 8.717,79.985 8.438,79.654 8.107,79.324 7.853,79.121 7.599,78.943 7.345,78.842 6.914,78.689 6.533,78.562 5.948,78.511 5.263,78.537 4.755,78.638 4.247,78.842 3.815,79.121 3.383,79.451 2.977,79.908 2.672,80.391 2.443,80.924 2.316,81.483 2.265,82.017 2.342,82.677 2.519,83.287 2.875,83.947 3.358,84.557 3.942,84.988 4.424,85.242 5.034,85.446
  pour cut-out: 10.216,86.538 10.216,72.415 26.751,72.415 26.802,86.919 26.776,87.097 16.542,87.107 15.942,87.108 10.647,87.097 10.216,86.538 16.597,86.538 26.167,86.538 26.167,72.898 10.698,72.898 10.698,86.532
  pour cut-out: 33.643,48.489 33.643,42.489 37.643,42.489 37.643,48.489
  pour cut-out: 18.153,115.724 18.509,115.902 18.89,116.054 19.22,116.13 19.55,116.181 19.956,116.181 20.363,116.156 20.795,116.029 21.125,115.927 21.557,115.698 21.861,115.495 22.141,115.241 22.395,114.962 22.598,114.657 22.725,114.403 22.852,114.098 22.954,113.768 23.004,113.463 23.029,112.987 23.03,112.6 22.954,112.193 22.801,111.736 22.623,111.38 22.446,111.101 22.192,110.796 21.861,110.517 21.582,110.314 21.201,110.085 20.896,109.958 20.515,109.856 20.16,109.806 19.779,109.78 19.321,109.831 18.864,109.933 18.458,110.11 18.153,110.263 17.924,110.441 17.594,110.695 17.493,110.822 17.239,111.126 17.035,111.406 16.908,111.685 16.781,111.99 16.705,112.295 16.654,112.6 16.629,112.904 16.654,113.235 16.705,113.59 16.807,113.946 16.934,114.301 17.086,114.632 17.239,114.886 17.467,115.165 17.747,115.444
  pour cut-out: 18.156,102.737 18.512,102.915 18.893,103.067 19.223,103.143 19.553,103.194 19.959,103.194 20.366,103.169 20.798,103.042 21.128,102.94 21.56,102.711 21.864,102.508 22.144,102.254 22.398,101.975 22.601,101.67 22.728,101.416 22.855,101.111 22.957,100.781 23.007,100.476 23.032,100 23.033,99.613 22.957,99.206 22.804,98.749 22.626,98.393 22.449,98.114 22.195,97.809 21.864,97.53 21.585,97.327 21.204,97.098 20.899,96.971 20.518,96.869 20.163,96.819 19.782,96.793 19.324,96.844 18.867,96.946 18.461,97.123 18.156,97.276 17.927,97.454 17.597,97.708 17.496,97.835 17.242,98.139 17.038,98.419 16.911,98.698 16.784,99.003 16.708,99.308 16.657,99.613 16.632,99.917 16.657,100.248 16.708,100.603 16.81,100.959 16.937,101.314 17.089,101.645 17.242,101.899 17.47,102.178 17.75,102.457
Bottom Layer:
  pour cut-out: 17.526,125.882 17.551,123.469 17.78,123.368 21.92,123.368 22.123,123.368 22.149,125.857
  pour cut-out: 14.345,125.576 14.345,124.637 14.802,124.637 14.802,125.576
  pour cut-out: 16.023,125.851 15.083,125.851 15.083,125.394 16.023,125.394
  pour cut-out: 14.625,86.538 14.625,85.741 14.404,85.52 14.342,85.428 14.32,85.319 14.148,85.319 14.148,84.252 15.062,84.252 14.89,84.993
  pour cut-out: 14.148,83.388 14.148,82.296 16.154,82.296 16.154,83.388
  pour cut-out: 14.102,80.721 12.959,80.721 12.959,81.305 13.64,81.178
  pour cut-out: 22.128,80.467 22.357,80.467 23.271,80.467 23.271,79.604 23.266,79.273 21.925,79.4
  pour cut-out: 25.176,131.206 28.651,131.242 28.626,128.397 29.978,125.785 29.997,123.292 25.369,123.383 25.185,123.666 25.176,131.206
  pour cut-out: 31.047,136.982 31.039,110.846 35.001,110.82 35.01,98.959 34.007,98.959 34.032,84.989 39.305,84.989 39.98,84.988 39.7,136.957
  pour cut-out: 19.237,22.034 19.237,21.094 18.78,21.094 18.78,22.034
  pour cut-out: 19.384,23.843 19.384,22.903 18.927,22.903 18.927,23.843
  pour cut-out: 19.479,25.77 19.479,24.83 19.022,24.83 19.022,25.77
  pour cut-out: 27.853,54.184 26.913,54.184 26.913,54.642 27.853,54.642
  pour cut-out: 26.827,54.706 25.887,54.706 25.887,55.163 26.827,55.163
  pour cut-out: 25.827,54.972 24.887,54.972 24.887,55.429 25.827,55.429
  pour cut-out: 24.211,52.095 23.271,52.095 23.271,51.638 24.211,51.638
  pour cut-out: 25.303,52.095 24.363,52.095 24.363,51.638 25.303,51.638
  pour cut-out: 26.395,52.095 25.456,52.095 25.456,51.638 26.395,51.638
  pour cut-out: 27.488,52.095 26.548,52.095 26.548,51.638 27.488,51.638
  pour cut-out: 27.31,53.01 28.25,53.01 28.25,53.467 27.31,53.467
  pour cut-out: 26.218,53.01 27.157,53.01 27.157,53.467 26.218,53.467
  pour cut-out: 25.125,53.01 26.065,53.01 26.065,53.467 25.125,53.467
  pour cut-out: 24.033,53.01 24.973,53.01 24.973,53.467 24.033,53.467
  pour cut-out: 24.338,66.116 24.338,63.373 28.123,63.373 28.123,66.091
  pour cut-out: 12.55,128.093 12.55,127.154 13.007,127.154 13.007,128.093
  pour cut-out: 33.377,106.772 32.438,106.772 32.438,107.229 33.377,107.229
  pour cut-out: 33.847,106.772 32.907,106.772 32.907,107.229 33.847,107.229
  pour cut-out: 33.377,106.486 32.438,106.486 32.438,106.029 33.377,106.029
  pour cut-out: 33.847,106.486 32.907,106.486 32.907,106.029 33.847,106.029
  pour cut-out: 33.377,109.026 32.438,109.026 32.438,108.569 33.377,108.569
  pour cut-out: 33.847,109.026 32.907,109.026 32.907,108.569 33.847,108.569
  pour cut-out: 33.584,109.322 32.644,109.322 32.644,109.779 33.584,109.779
  pour cut-out: 33.847,109.312 32.907,109.312 32.907,109.769 33.847,109.769
  pour cut-out: 27.97,113.716 27.97,114.656 27.513,114.656 27.513,113.716
  pour cut-out: 24.592,111.836 24.592,112.776 24.135,112.776 24.135,111.836
  pour cut-out: 22.086,95.218 23.026,95.218 23.026,94.761 22.086,94.761
  pour cut-out: 12.629,106.07 12.629,105.131 12.171,105.131 12.171,106.07
  pour cut-out: 12.629,106.985 12.629,107.925 12.171,107.925 12.171,106.985
  pour cut-out: 6.482,123.749 9.377,123.749 9.377,128.854 6.507,128.854
  pour cut-out: 23.848,112.044 23.848,116.048 26.345,116.053 26.352,114.544 26.352,112.044
  pour cut-out: 10.216,86.538 10.216,72.415 26.751,72.415 26.802,86.919 26.776,87.097 16.542,87.107 15.942,87.108 10.647,87.097 10.216,86.538 16.597,86.538 26.167,86.538 26.167,72.898 10.698,72.898 10.698,86.532
  pour cut-out: 24.17,99.387 24.17,95.787 28.57,95.787 28.57,99.387
  pour cut-out: 32.879,109.999 30.479,109.999 30.479,105.799 32.879,105.799
  pour cut-out: 33.847,108.569 32.647,108.569 32.647,106.969 33.847,106.969
  pour cut-out: 23.093,96.012 24.313,96.012 24.303,98.085 23.103,98.085
  pour cut-out: 14.94,81.026 14.94,75.946 20.02,75.946 20.02,81.026
  pour cut-out: 26.427,110.496 17.627,110.496 17.627,101.696 26.427,101.696
  pour cut-out: 0.259,51.384 6.177,51.333 6.329,30.175 -1.824,29.972
  pour cut-out: 33.643,48.489 33.643,42.489 37.643,42.489 37.643,48.489
  pour cut-out: 25.418,95.891 25.418,94.691 27.018,94.691 27.018,95.891
  pour cut-out: 18.853,19.052 18.853,19.991 19.311,19.991 19.311,19.052
  pour cut-out: 30.104,109.493 30.104,110.693 28.504,110.693 28.504,109.493
  pour cut-out: 30.104,111.1 28.904,111.1 28.904,109.5 30.104,109.5
  pour cut-out: 30.215,111.903 31.415,111.903 31.415,113.503 30.215,113.503
  pour cut-out: 29.615,111.903 30.815,111.903 30.815,113.503 29.615,113.503
  pour cut-out: 28.834,112.858 28.834,111.658 30.434,111.658 30.434,112.858
  pour cut-out: 27.97,114.186 27.97,115.126 27.513,115.126 27.513,114.186
  pour cut-out: 31.399,111.658 30.199,111.658 30.199,113.258 31.399,113.258
  pour cut-out: 28.682,105.582 28.682,106.782 30.282,106.782 30.282,105.582
  pour cut-out: 28.682,104.775 28.682,105.975 30.282,105.975 30.282,104.775
  pour cut-out: 28.682,106.502 28.682,107.702 30.282,107.702 30.282,106.502
  pour cut-out: 28.605,100.889 28.605,101.803 30.205,101.803 30.205,100.889
  pour cut-out: 12.171,103.784 12.171,102.584 10.571,102.584 10.571,103.784
  pour cut-out: 11.803,103.784 11.803,102.584 10.203,102.584 10.203,103.784
  pour cut-out: 14.584,105.461 15.784,105.461 15.784,103.861 14.584,103.861
  pour cut-out: 14.584,104.661 15.784,104.661 15.784,103.061 14.584,103.061
  pour cut-out: 10.343,107.975 11.543,107.975 11.543,106.375 10.343,106.375
  pour cut-out: 10.343,106.375 11.191,107.224 12.322,106.093 11.474,105.244
  pour cut-out: 23.005,111.619 23.005,112.819 24.604,112.819 24.604,111.619
  pour cut-out: 26.619,104.699 26.132,104.851 26.213,105.846 30.282,104.775 32.868,104.775 32.868,103.556 32.644,103.556 27.153,103.835

## Silkscreen, mask and mechanical layers (free items; w line width, h text height)
Top Overlay:
  drawing of 1989 lines, arcs and shapes, not listed
  text "B45120517E" at 13.746,54.966 h2.54
  text "9NC:5.1.9.002664" at 13.594,52.705 h2.54
  text "9NC:5.1.9.002664" at 38.994,1.651 h2.54
  text "B45120517E" at 60.304,1.524 h2.54
Bottom Overlay:
  text "GND" at 20.604,35.56 h1.02
  text "P2_1" at 20.503,34.798 h1.02
  text "CLK" at 20.63,33.782 h1.02
  text "CSS" at 20.68,32.995 h1.02
  text "MOSI" at 20.68,32.156 h1.02
  text "MISO" at 20.655,31.318 h1.02
Mechanical 1:
  circle w0.127: c19.829,86.007 r2.5
  circle w0.127: c19.829,73.3 r2.5
  circle w0.127: c13.679,118.909 r1.6
  circle w0.127: c26.659,40.76 r1.6
  circle w0.127: c19.829,46.7 r2.5
  circle w0.127: c5.802,97 r2.5
  circle w0.127: c33.856,97 r2.5
  circle w0.127: c33.856,82 r2.5
  circle w0.127: c33.129,60 r2.5
  circle w0.127: c5.802,82 r2.5
  circle w0.127: c6.529,60 r2.5
  circle w0.127: c19.829,60 r2.5
  circle w0.127: c7.817,126 r2.5
  circle w0.127: c33.841,38 r2.5
  circle w0.127: c19.829,34 r2.5
  circle w0.127: c19.832,21 r2.5
  circle w0.127: c5.817,38 r2.5
  circle w0.127: c32.614,112.987 r2.5
  circle w0.127: c19.829,112.987 r2.5
  circle w0.127: c19.829,100.007 r2.5
  circle w0.127: c7.043,112.987 r2.5
  circle w0.127: c31.841,126 r2.5
  circle w0.127: c31.841,126 r1.423
  circle w0.127: c7.043,112.987 r1.423
  circle w0.127: c19.829,100.007 r1.423
  circle w0.127: c19.829,112.987 r1.423
  circle w0.127: c32.614,112.987 r1.423
  circle w0.127: c6.529,60 r1.423
  circle w0.127: c5.817,38 r1.423
  circle w0.127: c5.802,97 r1.423
  circle w0.127: c5.802,82 r1.423
  circle w0.127: c19.832,21 r1.423
  circle w0.127: c19.829,34 r1.423
  circle w0.127: c33.841,38 r1.423
  circle w0.127: c7.817,126 r1.423
  circle w0.127: c19.829,60 r1.423
  circle w0.127: c19.829,46.7 r1.423
  circle w0.127: c33.856,82 r1.423
  circle w0.127: c33.129,60 r1.423
  circle w0.127: c19.829,86.007 r1.423
  circle w0.127: c19.829,73.3 r1.423
  circle w0.127: c33.856,97 r1.423
  circle w0.127: c26.659,40.76 r1.6
  circle w0.127: c13.679,118.909 r1.6
  circle w0.127: c19.829,132.85 r0.25
  lines w0.127: 18.365,124.448 cw(c18.579,124.659) 18.879,124.659 cw(c18.579,124.659) 18.368,124.445 ; 21.289,124.445 cw(c21.079,124.659) 21.303,124.46 ; 21.313,124.845 21.313,124.847 ; 23.811,31.5 38.257,31.5 38.257,133.5 24.829,133.5 24.829,123.5 14.829,123.5 14.829,133.5 1.4,133.5 1.4,31.5 15.846,31.5 15.846,11.5 23.811,11.5 23.811,31.5 ; 23.811,31.5 39.658,31.5 39.658,43.5 38.257,43.5 38.257,76 39.658,76 39.658,101.5 38.257,101.5 38.257,109.5 39.658,109.5 39.658,123.94 38.257,123.94 38.257,133.8 27.057,133.8 27.057,136.5 12.6,136.5 12.6,133.8 1.4,133.8 1.4,123.94 0,123.94 0,109.5 1.4,109.5 1.4,101.5 0,101.5 0,76 1.4,76 1.4,43.5 0,43.5 0,31.5 15.829,31.5 15.829,6.01 23.829,6.01 23.811,31.5 ; 2.629,45.5 ccw(c3.979,45.5) 5.329,45.5 5.329,48.5 ccw(c3.979,48.5) 2.629,48.5 2.629,45.5 ; 3.629,44.35 ccw(c3.979,44.35) 4.329,44.35 4.329,46.65 ccw(c3.979,46.65) 3.629,46.65 3.629,44.35 ; 18.709,130.09 20.949,130.09 20.949,133.85 18.709,133.85 18.709,130.09 ; 34.329,45.5 ccw(c35.679,45.5) 37.029,45.5 37.029,48.5 ccw(c35.679,48.5) 34.329,48.5 34.329,45.5 ; 35.329,44.35 ccw(c35.679,44.35) 36.029,44.35 36.029,46.65 ccw(c35.679,46.65) 35.329,46.65 35.329,44.35
Mechanical 2:
  drawing of 406 lines, arcs and shapes, not listed
Mechanical 3:
  lines w0.127: 10.698,72.898 10.698,86.538 26.167,86.538 26.167,72.898 10.698,72.898
Drill Drawing:
  text ".Legend" at 20.477,170.891 h1.52

## Text inside footprints (layer, text, board x,y; h text height)
C15: Bottom Overlay "+" at 18.928,56.464 h1.02 r180
TECH: Top Overlay "11. FINISHED" at 196.194,22.454 h1.52; Top Overlay "10. SQUARE RESISTANCE" at 196.194,25.502 h1.52; Top Overlay "9. SILKSCREEN" at 196.194,28.55 h1.52; Top Overlay "8. SOLDERMASK" at 196.194,31.598 h1.52; Top Overlay "7. TWIST AND ROW" at 196.194,34.646 h1.52; Top Overlay "6. PCB MATIREL" at 196.194,37.694 h1.52; Top Overlay "3. PCB THICKNESS" at 196.194,46.838 h1.52; Top Overlay "2. LAYERS" at 196.194,49.886 h1.52; Top Overlay "1. SPEC IPC-2221 AND IPC-2222" at 196.194,52.68 h1.52; Top Overlay "NOTE:ONLESS OTHERWISE SPECIFIED" at 196.194,55.982 h1.52; Top Overlay "DATE: 2017.04.10" at 228.199,61.315 h1.52; Top Overlay "Drawn By: YAOYF" at 196.195,61.315 h1.52; Top Overlay "MODE :" at 207.878,71.73 h1.52; Top Overlay "B45120517E" at 207.853,67.056 h2.54; Top Overlay "DUSUN ELECTRON CO.;LTD" at 204.865,77.608 h1.52; Top Overlay "TITLE :" at 196.195,81.635 h1.52; Top Overlay "4. COPPER THICKNESS" at 196.194,43.79 h1.52; Top Overlay "5. GOLD THICKNESS" at 196.194,40.742 h1.52; Top Overlay "FR-4" at 225.658,37.948 h1.52; Top Overlay "0.75%" at 225.658,34.9 h1.52; Top Overlay "white" at 225.658,28.55 h1.52; Top Overlay "BLACK" at 225.658,31.852 h1.52; Top Overlay "gold" at 225.658,22.454 h1.52; Top Overlay "<35R" at 225.658,25.756 h1.52; Top Overlay "non" at 225.658,40.996 h1.52; Top Overlay "35uM" at 225.658,44.044 h1.52; Top Overlay "1.2mm" at 225.658,47.092 h1.52; Top Overlay "2" at 225.658,49.886 h1.52
U4: Bottom Overlay "1" at 24.211,62.281 h1.02